# Altium PCB basketball_robot_connection_strip_2018.PcbDoc
Units mm, origin at the board's own origin, x right, y up, seen from the top; angles counter-clockwise.
Board outline 138 x 26 mm, 2 copper layers (Top Layer, Bottom Layer), stack 1.571 mm thick; 46 components, 32 nets, 155 pads, 116 vias.
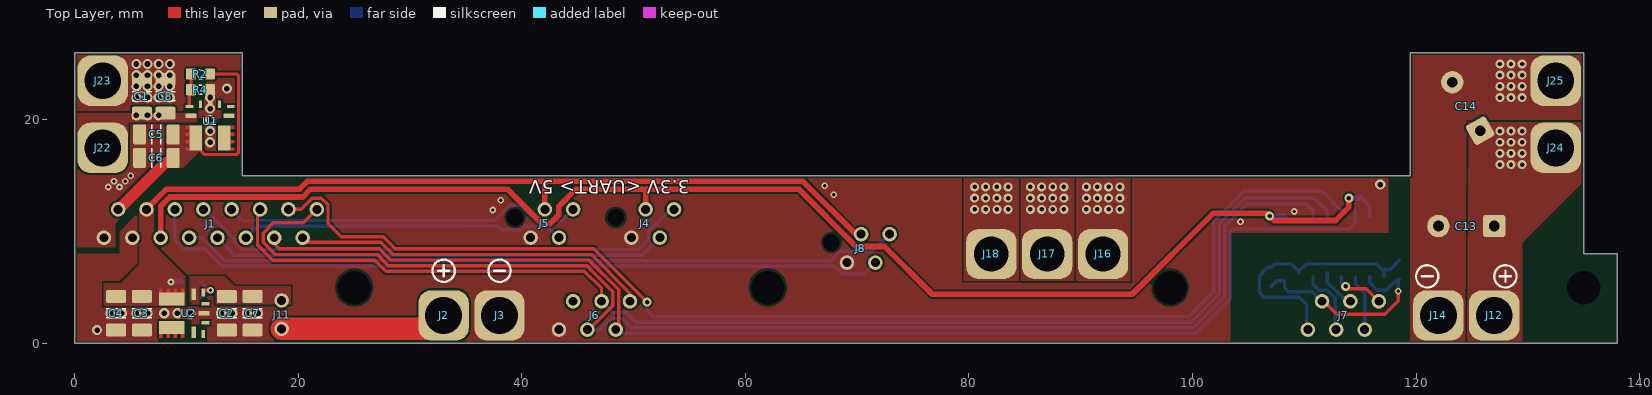
[diagram p0: Top Layer view]
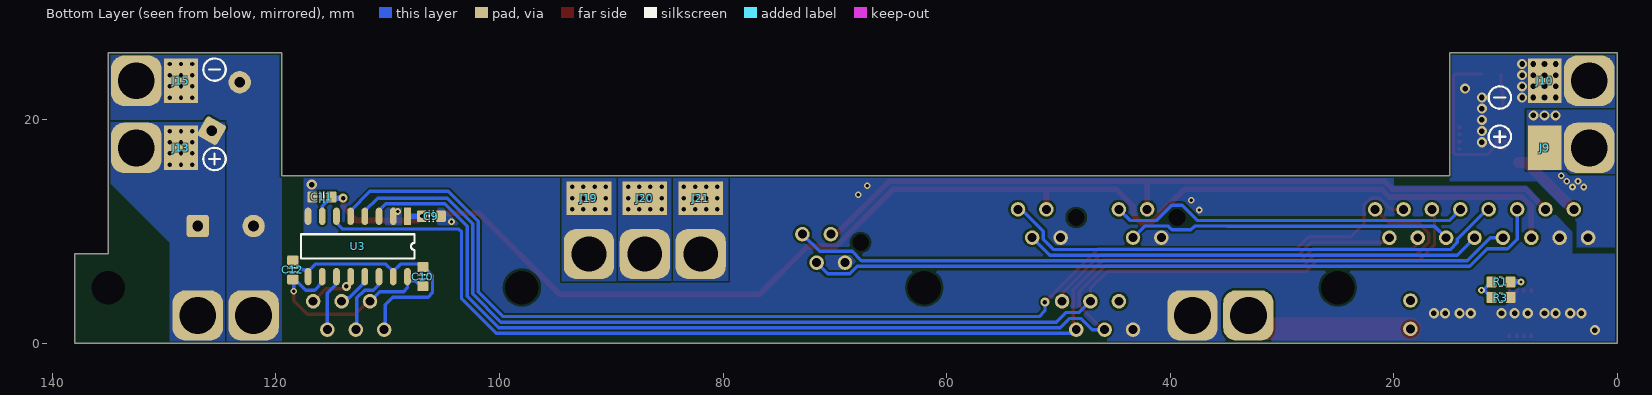
[diagram p1: Bottom Layer view, seen from below]

## Layer stack, top to bottom
Top Solder: solder mask 0.0102, Solder Resist, Dk 3.5
Top Layer: signal copper 0.0356
Dielectric 1: dielectric 1.5, FR-4, Dk 4.8
Bottom Layer: signal copper 0.0356
Bottom Solder: solder mask 0.0102, Solder Resist, Dk 3.5

## Board outline
0,0 0,26 15,26 15,15 119.5,15 119.5,26 135,26 135,8 138,8 138,0

## Design rules (kind name [scope] priority, off if disabled: settings)
BoardOutlineClearance [All] p1: gap=0.2 ignorepadtopadclearanceinfootprint=FALSE except(0: Arc-SplitContinuation Track-SplitContinuation SMDPad-SplitContinuation THPad-SplitContinuation Via-SplitContinuation Fill-SplitContinuation Poly-SplitContinuation Region-SplitContinuation Text-SplitContinuation)
Clearance ClearanceKeepOut [All vs OnLayer('Keep-Out Layer')] p1: gap=0.1 ignorepadtopadclearanceinfootprint=FALSE
Clearance [All] p2: gap=0.2 ignorepadtopadclearanceinfootprint=FALSE
ComponentClearance ComponentClearanceIgnore [HasFootprint('POWER-PAD-4x3')] p1: gap=0 collisioncheckmode=3 verticalgap=0 showdistances=FALSE
ComponentClearance NetTieClearance [HasFootprint('NET-TIE-0602')] p2: gap=0 collisioncheckmode=3 verticalgap=0 showdistances=FALSE
ComponentClearance [All] p3: gap=0.2 collisioncheckmode=3 verticalgap=0.2 showdistances=FALSE
DiffPairsRouting [All] p1: maxlimit=0.3 minlimit=0.2 mostfreqgap=0.2 toplayer_minwidth=0.2 toplayer_maxwidth=1 toplayer_prefwidth=0.3 bottomlayer_minwidth=0.2 bottomlayer_maxwidth=1 bottomlayer_prefwidth=0.3 maxuncoupledlength=12.7
HoleSize [All] p1: absolutevalues=TRUE maxlimit=5 minlimit=0.3 maxpercent=80.000 minpercent=20.000
HoleToHoleClearance [All] p1: gap=0.3 allowstackedmicrovias=TRUE
MinimumSolderMaskSliver [All] p1: minsoldermaskwidth=0.2
PolygonConnect [All] p1: connectstyle=Direct reliefconductorwidth=0.254 reliefentries=4 polygonreliefangle="90 Angle" airgapwidth=0.254
RoomDefinition basketball_robot_connection_strip_2018 [InComponentClass('basketball_robot_connection_strip_2018')] p1: confinementstyle=ConfineIn formatcopy=TRUE lockcomponents=FALSE outline -16.3,-20.7 157.5,-20.7 157.5,81.5 -16.3,81.5
RoutingVias [All] p1: holewidth=0.3 width=0.6 viastyle="Through Hole" minholewidth=0.3 minwidth=0.6 maxholewidth=2 maxwidth=3
SolderMaskExpansion SolderMaskExpansionVia [IsVia And (Not IsTestpoint)] p1: expansion=-5
SolderMaskExpansion [All] p2: expansion=0.1
Width [All] p1: maxlimit=5 minlimit=0.2 preferedwidth=0.2 minimp=50.000000 maximp=50.000000 favimp=50.000000
25 further rules are at their usual default settings.

## Components (designator, comment, footprint, x,y, rotation, side; value= is the part's Value field where it differs from the comment)
C1 "10u" CAPC3216X180N 6,22.1 r90 top value=10µ
C2 "10u" CAPC3216X180N 13.6,2.7 r270 top value=10µ
C3 "47u" CAPC3216X180N 6,2.7 r270 top value=10µ
C4 "47u" CAPC3216X180N 3.7,2.7 r270 top value=10µ
C5 "47u" CAPC3216X180N 7.3,18.7 r180 top value=10µ
C6 "47u" CAPC3216X180N 7.3,16.6 r180 top value=10µ
C7 "10u" CAPC3216X180N 15.9,2.7 r270 top value=10µ
C8 "10u" CAPC3216X180N 8.1,22.1 r90 top value=10µ
C9 "100n" CAPC1608X90N 106.1,11.38 r180 bottom
C10 "100n" CAPC1608X90N 106.85,5.975 r90 bottom
C11 "100n" CAPC1608X90N 115.9,13.1 r180 bottom
C12 "100n" CAPC1608X90N 118.5,6.575 r270 bottom
C13 "470u" CAPE10.0MM_Rad_10x14mm 124.5,10.5 r180 top value=470µ
C14 "470u" CAPE10.0MM_Rad_10x14mm 124.5,21.2 r120 top value=470µ
J1 "HEADER-16" MICRO-MATCH-MOB-16 2.605,9.455 r0 top
J2 "HEADER-1" 2MM-BULLET-PLUG-VIA#1 33,2.5 r0 top
J3 "HEADER-1" 2MM-BULLET-PLUG-VIA#1 38,2.5 r0 top
J4 "XBEE" MICRO-MATCH-FOB-04 49.8,9.46 r180 top
J5 "LIDAR" MICRO-MATCH-FOB-04 40.78,9.46 r180 top
J6 "ALARM_PC" MICRO-MATCH-MOB-06 43.32,1.23 r0 top
J7 "ALARM_M" MICRO-MATCH-MOB-06 110.32,1.23 r0 top
J8 "BALLSENS" MICRO-MATCH-FOB-04 69.09,7.23 r180 top
J9 "HEADER-1" POWER-PAD-4x3#1 6.5,17.5 r270 bottom
J10 "HEADER-1" POWER-PAD-4x3#1 6.5,23.5 r270 bottom
J11 "MB-PWR-JMP" PIN-HEADER-2 18.5,3.84 r270 top
J12 "HEADER-1" 2MM-BULLET-PLUG-VIA#1 127,2.5 r0 top
J13 "HEADER-1" POWER-PAD-4x3#1 128.5,17.5 r270 bottom
J14 "HEADER-1" 2MM-BULLET-PLUG-VIA#1 122,2.5 r0 top
J15 "HEADER-1" POWER-PAD-4x3#1 128.5,23.5 r270 bottom
J16 "HEADER-1" 2MM-BANANA-VIA 92,8 r0 top
J17 "HEADER-1" 2MM-BANANA-VIA 87,8 r0 top
J18 "HEADER-1" 2MM-BANANA-VIA 82,8 r0 top
J19 "HEADER-1" POWER-PAD-4x3#1 92,13 r180 bottom
J20 "HEADER-1" POWER-PAD-4x3#1 87,13 r180 bottom
J21 "HEADER-1" POWER-PAD-4x3#2 82,11.795 r180 bottom
J22 "HEADER-1" 2MM-BULLET-PLUG-VIA#1 2.5,17.5 r0 top
J23 "HEADER-1" 2MM-BULLET-PLUG-VIA#1 2.5,23.5 r0 top
J24 "HEADER-1" 2MM-BULLET-PLUG-VIA#2 132,17.5 r0 top
J25 "HEADER-1" 2MM-BULLET-PLUG-VIA#1 132.5,23.5 r0 top
R1 "10k" RESC1608X55N 10.4,5.5 r0 bottom value=10K
R2 "10k" RESC1608X55N 11.245,24.1 r180 top value=10K
R3 "1.37k" RESC1608X55N 10.4,4.1 r180 bottom value=10K
R4 "2.21k" RESC1608X55N 11.245,22.7 r0 top value=10K
U1 "TPSM84209" TPSM84209 12.1,19.3 r0 top
U2 "TPSM84209" TPSM84209 9.6,2.7 r270 top
U3 "SI8641" SOIC16 108.24,11.375 r270 bottom

## Footprints (in the part's own frame and the unit in brackets; to place one, negate y for a bottom-side part, rotate by r counter-clockwise, add the part's x,y. Pads: shape width x height; smd on the part's side, far side on the other; paste and mask are expansions set on the pad)
2MM-BANANA-VIA [mm]
  rrect50% 4.5x4.5 hole 3.1: 1(0,0)
  body extent -2,-2 2,2, height 1.51
2MM-BULLET-PLUG-VIA#1 [mm]
  rrect50% 4.5x4.5 hole 3.3: 1(0,0)
2MM-BULLET-PLUG-VIA#2 [mm]
  rrect50% 4.5x4.5 hole 3.3: 1(0.5,0)
CAPC1608X90N [mm] "Chip Capacitor, Body 1.6x0.8mm, EIA 0603, IPC Medium Density"
  round 0.254 on Mech15: 0(0,0)
  rrect25% 0.9x1 smd: 1(-0.85,0) 2(0.85,0)
  Top Layer pour cut-out: -0.6,0.5 -0.4,0.7 0.4,0.7 0.6,0.5 0.6,-0.5 0.4,-0.7 -0.4,-0.7 -0.6,-0.5
  silkscreen extent -0.18,-0.48 0.18,0.48, body extent -0.85,-0.45 0.85,0.45, height 0.89
CAPC3216X180N [mm] "Chip Capacitor, Body 3.2x1.6mm, 1.8mm H, EIA 1206, IPC Medium Density"
  round 0.508 on Mech15: 0(0,0)
  rrect25% 1.15x1.8 smd: 1(-1.5,0) 2(1.5,0)
  silkscreen extent -0.4,-0.88 0.4,0.88, body extent -1.7,-0.9 1.7,0.9, height 1.8
CAPE10.0MM_Rad_10x14mm [mm] "10mm Pitch Radial Capacitor 10x14mm DxH"
  round 0.5 on Mech15: 0(0,0)
  rrect25% 2x2 hole 0.965: 1(-2.5,0)
  round 2 hole 0.965: 2(2.5,0)
  body extent -5.25,-5.24 5.21,5.24, height 13.99
MICRO-MATCH-FOB-04 [mm]
  round 1.3 hole 0.8: 1(0,0) 2(-1.27,-2.54) 3(-2.54,0) 4(-3.81,-2.54)
  round 0 hole 1.5 unplated: drill(1.4,-1.8)
  body extent -5.41,-3.77 1.6,1.23, height 4
MICRO-MATCH-MOB-06 [mm]
  round 1.3 hole 0.8: 1(0,0) 2(1.27,2.54) 3(2.54,0) 4(3.81,2.54) 5(5.08,0) 6(6.35,2.54)
  body extent -2.22,-1.23 8.58,3.77, height 6.9
MICRO-MATCH-MOB-16 [mm]
  round 1.3 hole 0.8: 1(0,0) 2(1.27,2.54) 3(2.54,0) 4(3.81,2.54) 5(5.08,0) 6(6.35,2.54) 7(7.62,0) 8(8.89,2.54) 9(10.16,0) 10(11.43,2.54) 11(12.7,0) 12(13.97,2.54) 13(15.24,0) 14(16.51,2.54) 15(17.78,0) 16(19.05,2.54)
  body extent -2.22,-1.23 21.28,3.77, height 6.9
PIN-HEADER-2 [mm]
  round 1.3 hole 0.8: 1(0,0) 2(2.54,0)
POWER-PAD-4x3#1 [mm]
  rect 4x3 smd: 1(0,0)
POWER-PAD-4x3#2 [mm]
  rect 4x3 smd: 1(0,1.205)
RESC1608X55N [mm] "Chip Resistor, Body 1.6x0.8mm, EIA 0603, IPC Medium Density"
  round 0.254 on Mech15: 0(0,0)
  rrect25% 0.9x1 smd: 1(-0.85,0) 2(0.85,0)
  Top Layer pour cut-out: -0.6,0.5 -0.4,0.7 0.4,0.7 0.6,0.5 0.6,-0.5 0.4,-0.7 -0.4,-0.7 -0.6,-0.5
  silkscreen extent -0.15,-0.41 0.15,0.41, body extent -0.87,-0.47 0.88,0.48, height 0.54
SOIC16 [mm]
  rect 1.55x0.6 smd: 1(0,0)
  oval 1.55x0.6 smd: 2(0,-1.27) 3(0,-2.54) 4(0,-3.81) 5(0,-5.08) 6(0,-6.35) 7(0,-7.62) 8(0,-8.89) 9(5.4,-8.89) 10(5.4,-7.62) 11(5.4,-6.35) 12(5.4,-5.08) 13(5.4,-3.81) 14(5.4,-2.54) 15(5.4,-1.27) 16(5.4,0)
  silkscreen extent 1.61,-9.53 3.79,0.63, body extent -0.25,-9.42 5.66,0.57, height 1.46
TPSM84209 [mm]
  rect 0.7x0.3 smd: 1(-1.85,1.9) 6(1.85,1.9)
  rect 1x0.4 smd: 2(-1.7,1.05) 5(1.7,1.05)
  rect 1.125x2.25 smd: 3(-1.275,-0.925) 4(1.275,-0.925)
  rect 0.3x0.7 smd: 7(0.85,2.1) 9(-0.85,2.1)
  rect 0.4x1 smd: 8(0,1.95)
  Top Layer region: 1.825,-0.75 2.2,-0.75 2.2,-0.45 1.825,-0.45
  Top Layer region: 1.825,-2.05 2.2,-2.05 2.2,-1.75 1.825,-1.75
  Top Layer region: 1.825,-1.4 2.2,-1.4 2.2,-1.1 1.825,-1.1
  Top Layer region: 1.825,-0.1 2.2,-0.1 2.2,0.2 1.825,0.2
  Top Layer region: -1.825,-1.75 -2.2,-1.75 -2.2,-2.05 -1.825,-2.05
  Top Layer region: -1.825,-0.45 -2.2,-0.45 -2.2,-0.75 -1.825,-0.75
  Top Layer region: -1.825,0.2 -2.2,0.2 -2.2,-0.1 -1.825,-0.1
  Top Layer region: -1.825,-1.1 -2.2,-1.1 -2.2,-1.4 -1.825,-1.4
  Top Layer pour cut-out: 0.575,0.625 0.592,0.711 0.641,0.784 0.714,0.833 0.8,0.85 0.8,0.85 0.886,0.833 0.959,0.784 1.008,0.711 1.025,0.625 1.025,0.625 1.025,0.625 1.008,0.539 0.959,0.466 0.886,0.417 0.8,0.4 0.8,0.4 0.714,0.417 0.641,0.466 0.592,0.539 0.575,0.625
  Top Layer pour cut-out: -1.025,0.625 -1.008,0.711 -0.959,0.784 -0.886,0.833 -0.8,0.85 -0.8,0.85 -0.714,0.833 -0.641,0.784 -0.592,0.711 -0.575,0.625 -0.575,0.625 -0.575,0.625 -0.592,0.539 -0.641,0.466 -0.714,0.417 -0.8,0.4 -0.8,0.4 -0.886,0.417 -0.959,0.466 -1.008,0.539 -1.025,0.625
  Top Layer pour cut-out: 0.075,1.025
  body extent -2,-2.25 2,2.25, height 2.1

## Part data
C1 C2 C3 C4 C5 C6 C7 C8: library part CAPC_10u_1206_10V, "Capacitor SMD Cer 10uF 10% 10V X5R 1206", Manufacturer 1=KEMET, Manufacturer Part Number 1=C1206C106K8PACTU, Package / Case="1206 (3216 metric)", Ratings="10V; X5R", Supplier Part Number 1=C1206C106K8PACTU-ND, Tolerance=±10%, Material=ceramic, SCDType=undef, Supplier 1=Digi-Key
C9 C10 C11 C12: library part CAPC_100n_0603_X7R_50V_10%, "Capacitor SMD Cer 100nF 10% 50V X7R 0603", Manufacturer 1="AVX Corporation", Manufacturer 2="TDK Corporation", Manufacturer Part Number 1=06035C104KAT2A, Manufacturer Part Number 2=C1608X7R1H104K, Package / Case="0603 (1608 Metric)", Ratings="50V; X7R", Supplier Part Number 1=478-5052-1-ND, Tolerance=±10%, ComponentLink1Description=http://www.avx.com/docs/Catalogs/cx7r.pdf, ComponentLink1URL=http://www.avx.com/docs/Catalogs/cx7r.pdf, ComponentLink2Description=http://product.tdk.com/capacitor/mlcc/en/documents/mlcc_commercial_general_en.pdf, ComponentLink2URL=http://product.tdk.com/capacitor/mlcc/en/documents/mlcc_commercial_general_en.pdf, Material=ceramic, SCDType=spec, Supplier 1=Digi-Key, Supplier 2=Digi-Key, Supplier Part Number 2=445-1314-1-ND
C13 C14: library part CAPE_470u_16V_THT, "Capacitor THT Alum Elec 470uF 20% 16V", Manufacturer 1=NICHICON, Manufacturer 2=JD, Manufacturer Part Number 1=UHM1C471MPD6, Manufacturer Part Number 2=GT470UF16V_10x12mm, Package / Case=Radial, Ratings="16V; 105°C", Supplier Part Number 1=54K8151, Tolerance=±20%, Material="Al Electrolytic", SCDType=undef, Supplier 1=Newark
J4 J5 J8: library part HEADER-4
J6 J7: library part HEADER-6
J11: library part HEADER-2
R1 R2 R3 R4: library part RES_10K_0603_1%, "Resistor SMD chip 10k Ohm 0.1W 1% 0603", Manufacturer 1=Yageo, Manufacturer Part Number 1=RC0603FR-0710KL, Package / Case="0603 (1608 Metric)", Ratings=1/10W, Supplier Part Number 1=311-10.0KHRCT-ND, Tolerance=±1%, SCDType=spec, Supplier 1=Digi-Key

## Free pads (board coordinates)
  round 0 hole 3 unplated: 5(62,5) 6(98,5) 6(135,5) 7(25,5)

## Via types
v1: diameter 0.8, hole 0.4, Top Layer to Bottom Layer, 64 vias
v2: diameter 0.9, hole 0.5, Top Layer to Bottom Layer, 38 vias
v3: diameter 0.6, hole 0.3, Top Layer to Bottom Layer, 14 vias

## Nets (pads, with @x,y where several pads share a name; then routed paths per layer and width w, separated by ;. In a path a pad name is that pad's centre, name@x,y a point inside that pad or via, vN(x,y) a via of type N, cw(c..) or ccw(c..) an arc to the next point about the centre after c; other vN are vias at no path point)
3.3V: C9.1 C11.2 J1.5 J4.2 U3.1 U3.7 | length 127.3
  Top Layer w0.5: J1.5 7.685,12.281 8.504,13.1 20.4,13.1 21.1,13.8 38.694,13.8 41.782,10.712 42.54,10.712 43.3,11.472 43.3,12.266 44.834,13.8 51.07,13.8 ; J4.2 51.07,13.8 ; v1(114,13) 114,12.2 112.8,11 107.3,11 v1(106.9,11.4) 106.666,11.634 101.844,11.634 94.61,4.4 76.714,4.4 72.444,8.67 69.904,8.67 64.774,13.8 51.07,13.8
  Bottom Layer w0.3: C11.2 115.86,12.29 U3.7
  Bottom Layer w0.5: C9.1@107.1,11.375 U3.1 ; v1(114,13) 114.95,13 C11.2
3.3V_RS485: C5.1 C6.1 J1.2 R2.1 U1.3 | length 21
  Top Layer w0.3: U1.3 10.825,17.72 11.645,16.9 14.445,16.9 14.65,17.105 14.65,23.95 14.5,24.1 R2.1
  Top Layer w1: J1.2 3.895,11.995 8.1,16.2 C6.1@8.8,16.2
5V: C3.1 C4.1 J1.4 J5.2 J8.2 R1.1 U2.3 | length 70.4
  Top Layer w0.5: J1.4 6.415,12.001 8.214,13.8 20.1,13.8 20.8,14.5 42.05,14.5 ; J5.2 42.05,14.5 ; J8.2 69.88,9.77 65.15,14.5 42.05,14.5
  Bottom Layer w0.5: v3(8.6,5.5) R1.1@9.541,5.5
5V_EXT: C10.1 C12.2 J7.2 U3.10 U3.16 | length 19.3
  Top Layer w0.3: J7.2 111.73,3.77 112.9,2.6 117.2,2.6 118.4,3.8 v3(118.4,4.667)
  Bottom Layer w0.3: C10.1@107.05,5.125 107.525,5.6 108.24,5.6 108.24,4.96 108.57,4.63 110.73,4.63 J7.2 ; U3.10 115.86,5.46 116.55,4.77 117.339,4.77 118.194,5.625 C12.2@118.4,5.625 ; v3(118.4,4.667) C12.2@118.4,5.625 ; C12.2 C12.2@118.4,5.625
16V: C2.1 C7.1 J11.1 U2.2
16V_M: C1.1 C8.1 J9.1 J22.1 U1.2
  other v2: 5.5,20.4 6.5,20.4 7.5,20.4
BALL1: J1.6 J8.3 | length 67
  Bottom Layer w0.3: J1.6 8.955,9.311 9.811,8.455 11.644,8.455 13.199,6.9 68.006,6.9 68.676,6.23 70.63,6.23 J8.3
BALL2: J1.7 J8.4 | length 64.5
  Bottom Layer w0.3: J1.7 11.351,9.455 13.406,7.4 67.616,7.4 68.446,8.23 71.36,8.23 J8.4
GND: C2.2 C3.2 C4.2 C7.2 C9.2 C11.1 J1.3 J3.1 J4.1 J5.1 J6.1 J8.1 R3.2 U2.8 U3.2 U3.8
  other v2: 2,1.195 3.2,2.7 4.2,2.7 5.5,2.7 6.5,2.7 8,2.7 9.177,2.7 10.352,2.7 13.1,2.7 14.1,2.7 15.4,2.7 16.4,2.7 116.8,14.2
  other v3: 104.3,10.88 109.1,11.8 37.4,11.938 38.1,12.8 67.9,13.3 67.1,14.1
GND_EXT: C10.2 C12.1 J7.1 U3.9 U3.15 | length 23
  Bottom Layer w0.3: U3.15@109.51,6.325 U3.15@109.51,6.449 ; J7.1@110.225,1.535 110.225,3.445 109.54,4.13 106.395,4.13 106,4.525 106,6.075 106.75,6.825 C10.2 107.05,6.825 107.325,7.1 108.859,7.1 U3.15@109.51,6.449 ; U3.9 U3.9@117.13,6.449 ; C12.1 117.675,6.6 117.13,6.6 U3.9@117.13,6.449 ; U3.15@109.51,6.449 110.161,7.1 116.479,7.1 U3.9@117.13,6.449
GND_RS485: C1.2 C5.2 C6.2 C8.2 J1.1 J10.1 J23.1 R4.2 U1.8
  other v2: 12.1,18 12.1,19 12.1,20 12.1,21 5.5,22 6.5,22 7.5,22 8.5,22 12.1,22 13.6,22.8 5.5,23 6.5,23 7.5,23 8.5,23 5.5,24 6.5,24 7.5,24 8.5,24 5.5,25 6.5,25 7.5,25 8.5,25
  other v3: 3,14 4,14 3.5,14.5 4.5,14.5 5,15
MBAT+: C13.1 C14.1 J12.1 J13.1 J24.1
  other v1: 127.5,16 128.5,16 129.5,16 127.5,17 128.5,17 129.5,17 127.5,18 128.5,18 129.5,18 127.5,19 128.5,19 129.5,19
MBAT-: C13.2 C14.2 J14.1 J15.1 J25.1
  other v1: 127.5,22 128.5,22 129.5,22 127.5,23 128.5,23 129.5,23 127.5,24 128.5,24 129.5,24 127.5,25 128.5,25 129.5,25
MISO: J1.13 J6.5 U3.6 | length 111.8
  Top Layer w0.3: J1.13 17.845,8.897 18.287,8.455 27.257,8.455 28.252,7.46 46.005,7.46 48.67,4.795 48.67,1.5 J6.5
  Bottom Layer w0.3: J6.5 48.725,0.905 100.296,0.905 103.4,4.009 103.4,9.978 103.652,10.23 114.03,10.23 114.59,10.79 U3.6 U3.6@114.59,11.91
MISO_EXT: J7.5 U3.11 | length 5.1
  Bottom Layer w0.3: U3.11 114.59,5.31 115.4,4.5 J7.5
MOSI: J1.12 J6.4 U3.4 | length 111.7
  Top Layer w0.3: J1.12 16.345,11.765 16.345,8.834 17.724,7.455 26.843,7.455 27.838,6.46 45.591,6.46 47.13,4.921 J6.4
  Bottom Layer w0.3: J6.4 48.13,2.77 49.305,2.77 50.17,1.905 99.882,1.905 102.4,4.423 102.4,10.707 104.693,13 110.9,13 112.05,11.85 U3.4
MOSI_EXT: J7.4 U3.13 | length 3.4
  Bottom Layer w0.3: U3.13@112.05,6.325 U3.13 112.05,5.492 113.265,4.277 113.265,4.265 113.455,4.075 J7.4@114.035,4.075
NetJ2_1: J2.1 J11.2 | length 15
  Top Layer w2: J11.2 31.8,1.3 J2.1
NetJ16_1: J16.1 J19.1
  other v1: 90.5,12 91.5,12 92.5,12 93.5,12 90.5,13 91.5,13 92.5,13 93.5,13 90.5,14 91.5,14 92.5,14 93.5,14
NetJ17_1: J17.1 J20.1
  other v1: 85.5,12 86.5,12 87.5,12 88.5,12 85.5,13 86.5,13 87.5,13 88.5,13 85.5,14 86.5,14 87.5,14 88.5,14
NetJ18_1: J18.1 J21.1
  other v1: 80.5,12 81.5,12 82.5,12 83.5,12 80.5,13 81.5,13 82.5,13 83.5,13 80.5,14 81.5,14 82.5,14 83.5,14
NetR1_2: R1.2 R3.1 U2.1 | length 3
  Top Layer w0.3: U2.1 11.7,4.75 v3(12.136,4.75)
  Bottom Layer w0.3: R3.1 11.9,4.75 v3@12,4.75 ; R1.2 v3@12,4.75 ; v3@12.075,4.675 12.136,4.735 v3(12.136,4.75) v3@12,4.75
NetR2_2: R2.2 R4.1 U1.1 | length 3
  Top Layer w0.3: U1.1 10.25,22.555 R4.1 R2.2
RX_LIDAR: J1.10 J5.4 | length 32.5
  Bottom Layer w0.3: J1.10 15.035,10.995 22.069,10.995 22.074,11 37.564,11 38.924,12.36 39.836,12.36 41.196,11 43.59,11 J5.4
RX_XBEE: J1.8 J4.4 | length 45.7
  Bottom Layer w0.3: J1.8 11.639,11.995 14.305,9.329 14.305,9.041 14.946,8.4 50.4,8.4 51.34,9.34 51.34,10.034 53.306,12 J4.4
SCK: J1.16 J6.3 U3.3 | length 118.9
  Top Layer w0.3: J1.16 20.459,10.799 17.775,10.799 16.929,9.953 16.845,9.869 16.845,9.041 17.931,7.955 27.05,7.955 28.045,6.96 45.798,6.96 48.13,4.628 48.13,3.356 46.004,1.23 J6.3 J6.3@45.716,1.23
  Bottom Layer w0.3: J6.3 46.986,1.23 47.986,2.23 49.001,2.23 49.826,1.405 100.089,1.405 102.9,4.216 102.9,10.5 104.9,12.5 106.691,12.5 110.2,12.5 110.78,11.92 U3.3
SCK_EXT: J7.3 U3.14 | length 5.7
  Bottom Layer w0.3: U3.14 110.78,5.29 111.3,4.77 112.065,4.77 112.765,4.07 J7.3@112.765,1.535
SS1: J1.15 J6.6 | length 32.1
  Top Layer w0.3: J1.15 20.799,9.041 27.379,9.041 28.459,7.96 46.212,7.96 49.67,4.502 J6.6
SS2: J1.14 U3.5 | length 110
  Top Layer w0.3: J1.14 20.241,11.995 21.241,12.995 22.069,12.995 22.655,12.409 22.655,10.712 23.826,9.541 27.586,9.541 28.667,8.46 46.44,8.46 v1(51.2,3.7)
  Bottom Layer w0.3: v1(51.2,3.7) 51.2,2.925 51.72,2.405 99.675,2.405 101.9,4.63 101.9,10.914 104.586,13.6 111.6,13.6 113.32,11.88 U3.5
SS2_EXT: J7.6 U3.12 | length 4.6
  Top Layer w0.3: v1(113.7,5.1) 113.9,4.9 115.54,4.9 J7.6
  Bottom Layer w0.3: U3.12 113.32,5.48 v1(113.7,5.1)
TX_LIDAR: J1.11 J5.3 | length 29.2
  Bottom Layer w0.3: J1.11 16.345,10.495 34.895,10.495 34.9,10.5 37.8,10.5 38.14,10.16 39.836,10.16 40.176,10.5 42.28,10.5 J5.3
TX_XBEE: J1.9 J4.3 | length 40.9
  Bottom Layer w0.3: J1.9 14.32,7.9 50.78,7.9 J4.3
pads on no net: C1.0 C2.0 C3.0 C4.0 C5.0 C6.0 C7.0 C8.0 C9.0 C10.0 C11.0 C12.0 C13.0 C14.0 J4.drill J5.drill J6.2 J8.drill R1.0 R2.0 R3.0 R4.0 U1.4 U1.5 U1.6 U1.7 U1.9 U2.4 U2.5 U2.6 U2.7 U2.9

## Polygon pours and split planes (outlines as drawn)
GND on Top Layer "Top Layer-GND" (solid, remove dead copper, pour order 36): 0,0 0,8 4,8 4,10 8,14 19,14 19,15 117.5,15 117.5,9.9 103.4,9.9 103.4,0
5V on Top Layer "5V_L01_P012" (solid, remove dead copper, pour order 12): 2.6,3.373 9.9,3.373 9.9,6 7.055,8.845 7.055,12 5.774,12 5.774,7.074 4.1,5.4 2.6,5.4
GND_RS485 on Top Layer "GND_RS485_L01_P006" (solid, remove dead copper, pour order 6): 0,26 0,8.6 3.6,8.6 3.6,10.7 7.3,14.4 15,14.4 15,26
16V on Top Layer "16V_L01_P010" (solid, remove dead copper, pour order 10): 19.3,3.5 19.3,5.1 14.3,5.1 13.4,6 10.3,6 10.3,3.5 11.2,3.5 11.2,5.1 12.2,5.1 12.6,4.7 12.6,3.5
NetJ16_1 on Top Layer "Top Layer-NetJ16_1" (solid, remove dead copper, pour order 32): 89.564,15 89.564,5.575 94.416,5.575 94.416,15
NetJ17_1 on Top Layer "Top Layer-NetJ17_1" (solid, remove dead copper, pour order 30): 84.641,5.623 84.641,15 89.38,15 89.416,14.964 89.416,5.575
NetJ18_1 on Top Layer "Top Layer-NetJ18_1" (solid, remove dead copper, pour order 28): 79.539,5.625 79.539,15 84.436,15 84.436,5.625
MBAT+ on Top Layer "MBAT+_L01_P026" (solid, pour order 26): 124.6,0 124.6,20 135,20 135,14.5 129.5,9 129.5,0
MBAT- on Top Layer "MBAT-_L01_P014" (solid, pour order 14): 119.5,0 119.5,26 135,26 135,20 124.5,20 124.4,0
3.3V_RS485 on Top Layer "3.3V_RS485_L01_P004" (solid, remove dead copper, pour order 4): 8.2,15.7 9.7,15.7 11.4,17.4 11.4,19.5 8.2,19.5
16V_M on Top Layer "16V_M_L01_P000" (solid, pour order 0): 0,20.6 0,18.6 4.8,18.6 4.8,19.8 10.9,19.8 10.9,20.6
GND_RS485 on Bottom Layer "GND_RS485_L02_P008" (solid, pour order 8): 0,8.6 0,26 15,26 15,14.5 7.2,14.5 3.6,10.9 3.6,8.6
GND on Bottom Layer "Bottom Layer-GND" (solid, remove dead copper, pour order 34): 0,0 0,8 4,8 4,10 8.1,14.1 20,14.1 20,15 117.5,15 117.5,9.9 103.4,9.9 103.4,0
NetJ16_1 on Bottom Layer "Bottom Layer-NetJ16_1" (solid, remove dead copper, pour order 18): 89.564,15 94.416,15 94.416,5.575 94.266,5.575 89.564,5.575
NetJ17_1 on Bottom Layer "Bottom Layer-NetJ17_1" (solid, remove dead copper, pour order 22): 84.436,5.625 84.436,15 89.564,15 89.564,5.575
NetJ18_1 on Bottom Layer "Bottom Layer-NetJ18_1" (solid, remove dead copper, pour order 20): 79.539,5.625 79.539,15 84.436,15 84.436,5.625
MBAT+ on Bottom Layer "MBAT+_L02_P024" (solid, pour order 24): 124.6,0 129.5,0 129.5,9 135,14.5 135,20 124.6,20
MBAT- on Bottom Layer "MBAT-_L02_P016" (solid, pour order 16): 119.5,0 124.4,0 124.4,20 135,20 135,26 124.4,26 119.5,26
16V_M on Bottom Layer "16V_M_L02_P002" (solid, pour order 2): 0,15.2 4.2,15.2 4.5,15.5 8.1,15.5 8.1,20.9 0,20.9

## Silkscreen, mask and mechanical layers (free items; w line width, h text height)
Top Overlay:
  circle w0.2: c33,6.5 r1
  circle w0.2: c38,6.5 r1
  circle w0.2: c121,6 r1
  circle w0.2: c128,6 r1
  lines w0.2: 32.5,6.5 33.5,6.5 ; 33,6 33,7 ; 37.5,6.5 38.5,6.5 ; 120.5,6 121.5,6 ; 127.5,6 128.5,6 ; 128,5.5 128,6.5
  text "3.3V <UART> 5V" at 55,14.6 h1.2 r180
Bottom Overlay:
  circle w0.2: c10.5,22 r1
  circle w0.2: c10.5,18.5 r1
  circle w0.2: c125.5,16.5 r1
  circle w0.2: c125.5,24.5 r1
  lines w0.2: 10,18.5 11,18.5 ; 10,22 11,22 ; 10.5,18 10.5,19 ; 125,16.5 126,16.5 ; 125,24.5 126,24.5 ; 125.5,16 125.5,17
Bottom Solder:
  rectangle: 130,21.4 130.9,25.6
  rectangle: 129.8,15.4 130.9,19.6
  rectangle: 4.1,21.4 5,25.6
  rectangle: 4,15.4 5,19.6
Mechanical 1:
  the board outline again, w0.1
Mechanical 13:
  lines w0.1: 57,0 57,11 105,11 105,0 ; 119.5,5 129.5,5